# Altium PCB PCB_Sensor_de_Linha.PcbDoc
Units mm, origin at the board's own origin, x right, y up, seen from the top; angles counter-clockwise.
Board outline 8.25 x 8.89 mm, 2 copper layers (Top Layer, Bottom Layer); 6 components, 4 nets, 15 pads, 5 vias.
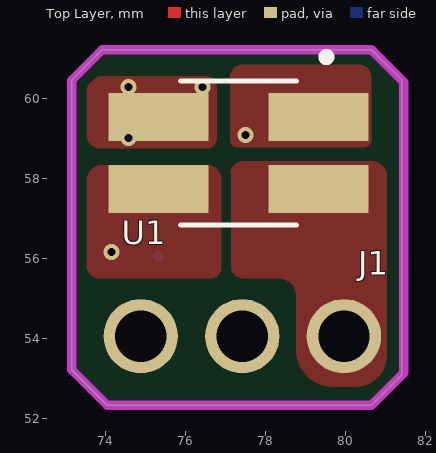
[diagram p0: Top Layer view]
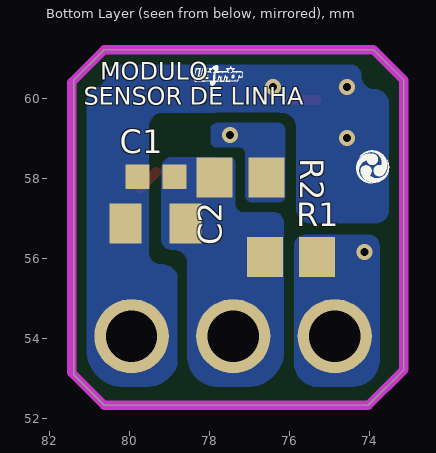
[diagram p1: Bottom Layer view, seen from below]

## Layer stack, top to bottom
Top Solder: solder mask 0.0102, Solder Resist, Dk 3.5
Top Layer: signal copper 0.0356
Dielectric 1: dielectric 0.32, FR-4, Dk 4.8
Bottom Layer: signal copper 0.0356
Bottom Solder: solder mask 0.0102, Solder Resist, Dk 3.5

## Board outline
74.041,52.324 80.645,52.324 81.407,53.086 81.407,60.452 80.645,61.214 73.914,61.214 73.152,60.452 73.152,53.213

## Design rules (kind name [scope] priority, off if disabled: settings)
Clearance [All] p1: gap=0.254 ignorepadtopadclearanceinfootprint=FALSE except(0: Arc-Hole Track-Hole SMDPad-Hole THPad-Hole Via-Hole Fill-Hole Poly-Hole Region-Hole Text-Hole)
PolygonConnect [All] p1: connectstyle=Direct reliefconductorwidth=0.254 reliefentries=4 polygonreliefangle="90 Angle" airgapwidth=0.254
RoutingVias [All] p1: holewidth=0.711 width=1.27 viastyle="Through Hole" minholewidth=0.711 minwidth=1.27 maxholewidth=0.711 maxwidth=1.27
SolderMaskExpansion [All] p1: expansion=0.102 istentingtop=FALSE
Width [All] p1: maxlimit=0.254 minlimit=0.254 preferedwidth=0.254
30 further rules are at their usual default settings.

## Components (designator, comment, footprint, x,y, rotation, side; value= is the part's Value field where it differs from the comment)
C1 "0.1uF" CAPC1005X55N 79.35,58.039 r180 bottom
C2 "10 uF" C0603 -107.848,-16.517 r180 bottom
J1 "Male Header 3" "MALE HEADER 3" 74.879,54.051 r0 top
R1 "3.3kR" RESISTOR_0603 75.971,56.032 r0 bottom
R2 "330R" RESISTOR_0603 77.241,58.014 r0 bottom
U1 "QRE1113" QRE1113 77.32,58.628 r270 top

## Footprints (in the part's own frame and the unit in brackets; to place one, negate y for a bottom-side part, rotate by r counter-clockwise, add the part's x,y. Pads: shape width x height; smd on the part's side, far side on the other; paste and mask are expansions set on the pad)
C0603 [mm]
  rect 0.8x1 smd: 1(-187.961,73.388) 2(-186.461,73.388)
  body extent -188.06,72.92 -186.36,73.82, height 0.8
CAPC1005X55N [mm]
  rect 0.6x0.62 smd: 1(-0.46,0) 2(0.46,0)
  body extent -0.5,-0.25 0.5,0.25, height 0.55
"MALE HEADER 3" [mm]
  round 1.86 hole 1.28: PIN1(0,0) PIN2(2.54,0) PIN3(5.08,0)
  body extent -1.27,-1.27 6.35,1.27, height 3.5
QRE1113 [mm]
  rect 1.2x2.5 smd: A(-0.9,2) C(-0.9,-2) CT(0.9,-2) ET(0.9,2)
  silkscreen extent -2.5,-1.45 1.8,2.3, body extent -1.8,-2.43 1.8,2.37, height 1.7
RESISTOR_0603 [mm]
  rect 0.9x1 smd: 1(-0.65,0) 2(0.65,0)
  body extent -0.8,-0.4 0.8,0.4, height 0.55

## Part data
C1: library part GRM155R61C104KA88D, "CAP CER 0.1uF 16V X5R 0402", Manufacturer=Murata, Operating Temperature="-55°C ~ 85°C", Package / Case="0402 (1005 Metric)", Supplier Part Number 1=81-GRM155R61C104KA8D, Tolerance=10%, Voltage - Rated=16V, Category="Ceramic Capacitors", ComponentLink1Description=Datasheet, ComponentLink1URL=https://br.mouser.com/datasheet/2/281/1/GRM155R61C104KA88_01A-1983743.pdf, ComponentLink2Description="Mouser Link", ComponentLink2URL=https://br.mouser.com/ProductDetail/Murata-Electronics/GRM155R61C104KA88D?qs=%2Fha2pyFadugsr51Fgcs3VGJIvx6dQb2fpcJyrxDKYTBEoW5q5paGTQ%3D%3D, Dieletric=X5R, ESR=-, Library Control - Checked Footprint=Yes, Library Control - Checked Schematic=Yes, Library Control - Last Update="24/07/2021 11:05", Library Control - Person that Checked Footprint=Guilherme, Library Control - Person that Checked Schematic=Guilherme, Library Control - Person that did the Last Update Footprint=Guilherme, Library Control - Person that did the Last Update Schematic=Guilherme, Library Ref=Capacitor, Part Number=GRM155R61C104KA88D, Price="1 = 0,10, 10=0,024, 100=0,011 (USD)", Size / Dimension="1,0 L x 0,5 W x 0,5 H", Supplier 1=Mouser
C2: library part GRM188R61C106MA73D, "CAP CER 10uF 16V X5R 0603", Manufacturer="MURATA ELECTRONICS", Operating Temperature="-55°C ~ 85ºC", Package / Case="0603(1608 metric)", Supplier Part Number 1=81-GRM188R61C106MA3D, Tolerance=20%, Voltage - Rated="16 VDC", Category="Ceramic capacitor", ComponentLink1Description=Datasheet, ComponentLink1URL=https://br.mouser.com/datasheet/2/281/1/GRM188R61C106MA73_01A-1985803.pdf, ComponentLink2Description="Mouser Link", ComponentLink2URL=https://br.mouser.com/ProductDetail/Murata-Electronics/GRM188R61C106MA73D?qs=OXzh9Ga2KBH8Bmnena8%252BFw%3D%3D, Dieletric=X5R, ESR=-, Library Control - Checked Schematic=Guilherme, Library Control - Last Update="27/06/2021 15:54", Library Control - Person that Checked Schematic=Guilherme, Library Control - Person that did the Last Update Footprint=Raquel, Library Control - Person that did the Last Update Schematic=Marcos, Library Ref=Capacitor, Part Number=GRM188R61C106MA73D, Price="1=0,28 10=0,196 100=0,111 1000=0,076 (USD)", Size / Dimension="1.6 mm L x 0.8 mm W x 0.8 mm H", Supplier 1=Mouser
R1: library part CRGCQ0603F3K3, "RES SMD 3.3K OHM 1% 1/10W 0603", Manufacturer="TE Connectivity / Holsworthy", Operating Temperature="- 55ºC ~ 125ºC", Package / Case="0603 (1608 Metric)", Power Rating="100 mW (1/10 W)", Resistor Type=Fixed, Supplier Part Number 1=279-CRGCQ0603F3K3, Temperature Coefficient="100 PPM / C", Tolerance="1 %", Voltage Rating="75 V", Category="Thick Film Resistors", ComponentLink1Description="Mouser Link", ComponentLink1URL=https://br.mouser.com/ProductDetail/TE-Connectivity-Holsworthy/CRGCQ0603F3K3?qs=sGAEpiMZZMvdGkrng054t7z4BkURc4Lz7mzhBruKq8fwVJ16OlxZFQ%3D%3D, ComponentLink2Description=Datasheet, ComponentLink2URL=https://br.mouser.com/datasheet/2/418/4/NG_DS_1773204-3_1-1358553.pdf, Library Control - Checked Footprint=Yes, Library Control - Checked Schematic=Yes, Library Control - Last Update="27/06/2021 20:27", Library Control - Person that Checked Footprint=Nikaum, Library Control - Person that Checked Schematic=Guilherme, Library Control - Person that did the Last Update Footprint=Dalarme, Library Control - Person that did the Last Update Schematic=Dalarme, Library Ref=Resistor, Part Number=CRGCQ0603F3K3, Price="1=0,10, 10=0,029, 100=0,011 (USD)", Size / Dimension="1.6 mm L x  0.8 mm W x  0.45 mm H", Supplier 1=Mouser
R2: library part RC0603JR-07330RL, "RES SMD 330 OHM 5% 1/10W 0603", Manufacturer=Yageo, Operating Temperature="- 55ºC ~ 155ºC", Package / Case="0603 (1806 Metric)", Power Rating="100 mW (1/10 W)", Resistor Type=Fixed, Supplier Part Number 1=603-RC0603JR-07330RL, Temperature Coefficient="100 PPM / C", Tolerance="5 %", Voltage Rating="75 V", Category="Thick Film Resistors - SMD", ComponentLink1Description="Mouser Link", ComponentLink1URL=https://br.mouser.com/ProductDetail/Yageo/RC0603JR-07330RL?qs=P6JsaOY39iiskIKe5bFlJA%3D%3D, ComponentLink2Description=Datasheet, ComponentLink2URL=https://br.mouser.com/datasheet/2/447/Yageo_03_18_2021_PYu_RC_Group_51_RoHS_L_11-2199992.pdf, Library Control - Checked Footprint=No, Library Control - Checked Schematic=Yes, Library Control - Last Update="26/06/21 14:47", Library Control - Person that Checked Schematic=Guilherme, Library Control - Person that did the Last Update Footprint=Dalarme, Library Control - Person that did the Last Update Schematic=Dalarme, Library Ref=Resistor, Part Number=RC0603JR-07330RL, Price="1=0,10, 10=0,015, 100=0,005 (USD)", Size / Dimension="1.6 mm L x  0.8 mm W x  0.45 mm H", Supplier 1=Mouser
U1: "PHOTOTRANSISTORQRE1113 - 1CH - Tube", Collector - Emitter Voltage VCEO Max="30 V", If - Forward Current="20 mA", Manufacturer="ON Semiconductor", Operating Temperature (Min - Máx)="-40~85 °C", Power Dissipation="75 mW", Vf - Forward Voltage="1,2 V", Vr - Reverse Voltage="5 V", ComponentLink1Description=Datasheet, ComponentLink1URL=https://www.mouser.com/datasheet/2/308/1/QRE1113_D-2319742.pdf, ComponentLink2Description="Mouser Link", ComponentLink2URL=https://www.mouser.com/ProductDetail/ON-Semiconductor-Fairchild/QRE1113GR?qs=Qb0BA3xILekkPpSVC5x7uQ%3D%3D, Fall time="20 us", Library Control - Checked Footprint=Yes, Library Control - Checked Schematic=Yes, Library Control - Last Update=15/06/2021, Library Control - Person that Checked Footprint=Nikaum, Library Control - Person that Checked Schematic=Nikaum, Library Control - Person that did the Last Update in Footprint=Nikaum, Library Control - Person that did the Last Update in Schematic=Nikaum, Library Ref=Diversos, Maximum Collector Current="20 mA", Mounting Style="Through Hole", Number of Channels=1, Output Type=Phototransistor, Packaging=Tube, Part Number=QRE1113, Price="1=1.36, 10=1.13, 100=0.639 (USD)", Sensing Distance="1 mm", Sensing Method=Reflective, Supplier 1=Mouser
J1: Library Control - Person that did the Last Update Schematic=Guilherme, Library Control - Persont that did the Last Update Footprint=Guilherme, Library Ref=Header, Number of Contacts=3, System=Connector

## Via types
v1: diameter 0.4, hole 0.2, Top Layer to Bottom Layer, tented both sides, 5 vias

## Nets (pads, with @x,y where several pads share a name; then routed paths per layer and width w, separated by ;. In a path a pad name is that pad's centre, name@x,y a point inside that pad or via, vN(x,y) a via of type N, cw(c..) or ccw(c..) an arc to the next point about the centre after c; other vN are vias at no path point)
3.3V: C1.2 C2.2 J1.PIN2 R1.2 R2.2
GND: C1.1 C2.1 J1.PIN3 U1.C U1.ET | length 1.3
  Top Layer w0.254: U1.C@75.343,59.955 U1.C@75.993,59.955 ; U1.ET@79.343,58.155 U1.ET@79.756,57.742 ; J1.PIN3@79.756,54.229 J1.PIN3@79.756,54.254
  other v1: 74.574,59.004 74.574,60.274 76.429,60.274
NetR2_1: R2.1 U1.A
  other v1: 77.495,59.08
Sinal: J1.PIN1 R1.1 U1.CT | length 0
  Bottom Layer w0.254: R1.1@75.3,56.053 R1.1
  other v1: 74.143,56.159

## Polygon pours and split planes (outlines as drawn)
NetR2_1 on Bottom Layer "NETR2_1_L02_P004" (solid, pour order 4): 76.962,57.404 ccw(c76.962,57.556) 77.114,57.556 77.114,58.623 cw(c77.267,58.623) 77.267,58.776 77.851,58.776 ccw(c77.851,58.903) 77.978,58.903 77.978,59.233 ccw(c77.826,59.233) 77.826,59.385 76.302,59.385 ccw(c76.302,59.207) 76.124,59.207 76.124,57.531 ccw(c76.251,57.531) 76.251,57.404
GND on Bottom Layer "GND_L02_P009" (solid, pour order 9): 79.604,52.781 cw(c79.604,53.619) 78.765,53.619 78.765,55.372 cw(c79.248,55.372) 79.248,55.855 ccw(c79.248,56.134) 79.527,56.134 79.527,59.309 ccw(c79.197,59.309) 79.197,59.639 76.2,59.639 ccw(c76.2,59.284) 75.844,59.284 75.844,57.252 cw(c75.463,57.252) 75.463,56.871 73.863,56.871 cw(c73.863,57.201) 73.533,57.201 73.533,59.868 cw(c73.889,59.868) 73.889,60.223 ccw(c73.889,60.554) 74.218,60.57 cw(c74.469,60.582) 74.469,60.833 80.3,60.833 cw(c80.3,60.535) 80.596,60.568 ccw(c80.965,60.608) 80.868,60.251 cw(c80.793,59.975) 81.077,59.944 81.077,53.696 cw(c80.163,53.695) 80.162,52.781
3.3V on Bottom Layer "3.3V_L02_P006" (solid, pour order 6): 77.368,58.369 77.368,57.353 cw(c77.165,57.353) 77.165,57.15 76.429,57.15 ccw(c76.429,56.871) 76.149,56.871 76.149,53.696 ccw(c77.064,53.696) 77.064,52.781 77.8,52.781 ccw(c77.8,53.543) 78.562,53.543 78.562,55.88 cw(c78.892,55.88) 78.892,56.21 78.943,56.21 ccw(c78.943,56.49) 79.223,56.49 79.223,58.217 ccw(c78.892,58.217) 79.019,58.522 77.521,58.522 ccw(c77.521,58.369)
Sinal on Bottom Layer "SINAL_L02_P001" (solid, pour order 1): 75.895,53.391 75.895,56.312 ccw(c75.616,56.312) 75.616,56.591 74.041,56.591 ccw(c74.041,56.312) 73.762,56.312 73.762,53.467 ccw(c74.447,53.467) 74.447,52.781 75.286,52.781 ccw(c75.286,53.391)
GND on Top Layer "GND_L01_P010" (solid, pour order 10): 73.863,58.75 cw(c73.863,59.08) 73.533,59.08 73.533,60.147 cw(c73.939,60.147) 73.939,60.554 76.505,60.554 cw(c76.505,60.274) 76.784,60.274 76.784,59.004 cw(c76.53,59.004) 76.53,58.75
GND on Top Layer "GND_L01_P008" (solid, pour order 8): 80.239,52.781 ccw(c80.239,53.569) 81.026,53.569 81.026,58.064 ccw(c80.67,58.064) 80.67,58.42 77.445,58.42 ccw(c77.445,58.09) 77.114,58.09 77.114,55.855 ccw(c77.47,55.855) 77.47,55.499 78.334,55.499 cw(c78.334,55.067) 78.765,55.067 78.765,53.721 ccw(c79.705,53.721) 79.705,52.781
NetR2_1 on Top Layer "NETR2_1_L01_P005" (solid, pour order 5): 77.292,58.776 cw(c77.292,58.953) 77.114,58.953 77.114,60.528 cw(c77.419,60.528) 77.419,60.833 80.34,60.833 cw(c80.34,60.528) 80.645,60.528 80.645,58.953 cw(c80.467,58.953) 80.467,58.776
Sinal on Top Layer "SINAL_L01_P002" (solid, pour order 2): 73.889,58.318 ccw(c73.889,57.963) 73.533,57.963 73.533,55.804 ccw(c73.838,55.804) 73.838,55.499 76.632,55.499 ccw(c76.632,55.753) 76.886,55.753 76.886,57.988 ccw(c76.556,57.988) 76.556,58.318

## Keep-outs
Keep-Out Layer:
  lines w0.234: 73.152,53.213 73.152,60.452 73.914,61.214 80.645,61.214 81.458,60.401 81.458,53.137 80.645,52.324 74.041,52.324 73.152,53.213

## Silkscreen, mask and mechanical layers (free items; w line width, h text height)
Bottom Overlay:
  drawing of 9 lines, arcs and shapes, not listed
  text "MODULO" at 80.747,60.312 h0.75
  text "SENSOR DE LINHA" at 81.153,59.683 h0.75
BoardOutLine:
  the board outline again, w0.254